# EAGLE board Rev_1 (EAGLE 9.5.2)
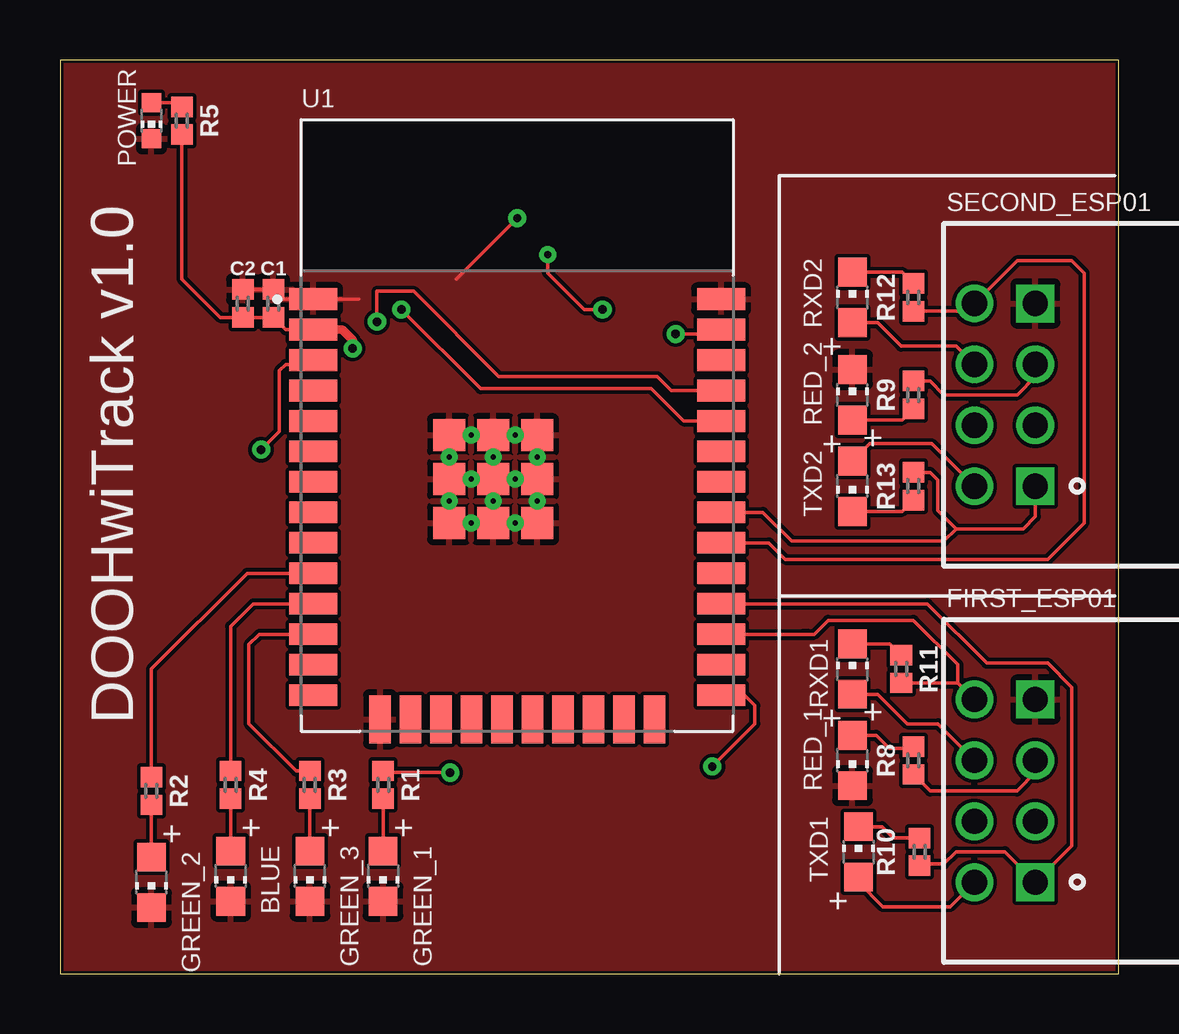
[diagram p0: board, top side]
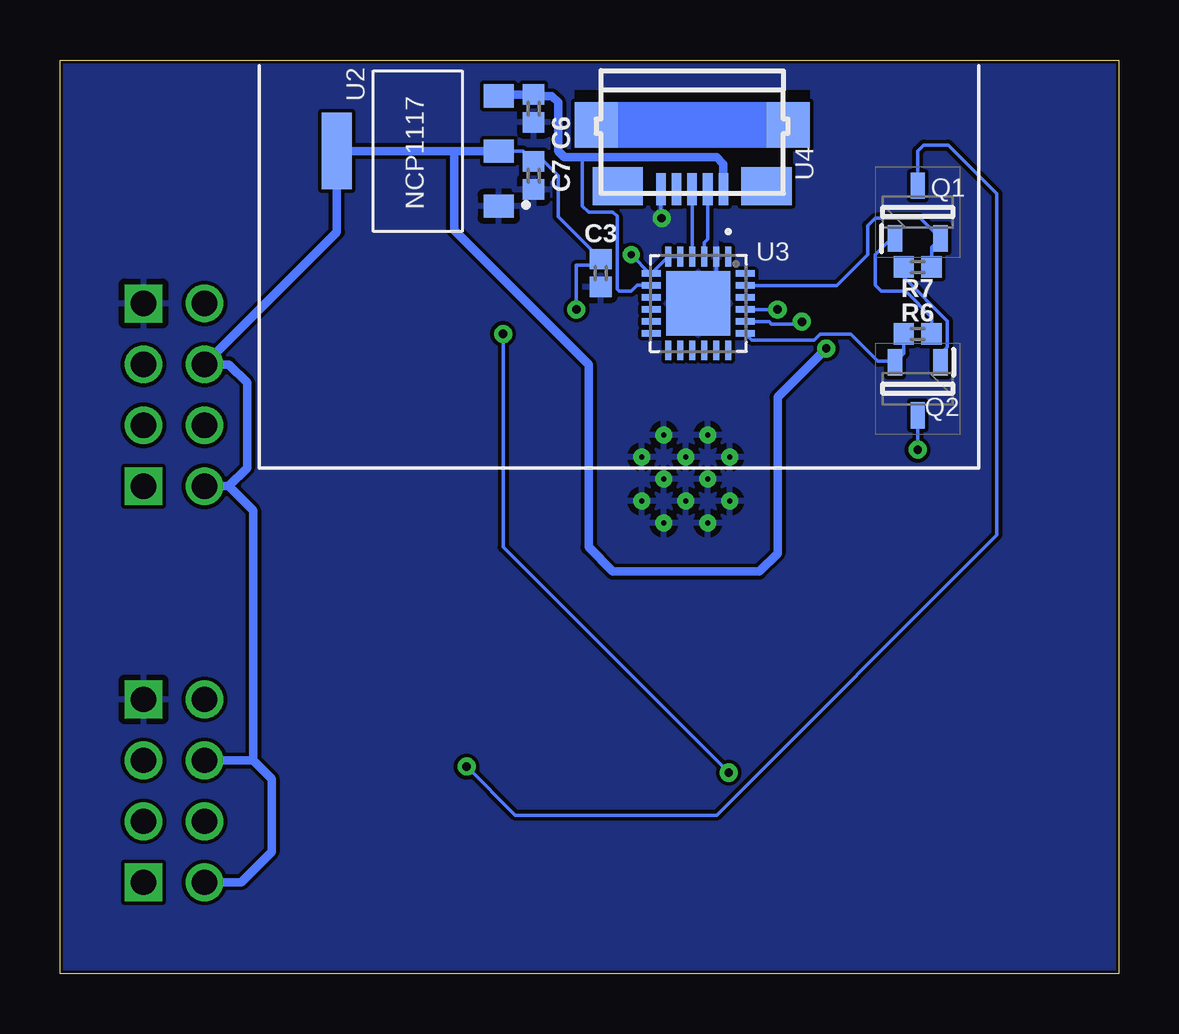
[diagram p1: board, bottom side, seen from below]

Size 44.12 x 38.09 mm. Coordinates in mm from the lower left corner, seen from the top.
Outline: 0,0 44.12,0 44.12,38.09 0,38.09 0,0
Copper layers (1*16): Top 0.035mm / dielectric 1.5mm / Bottom 0.035mm
Design rules "default *": minimum track width 6mil, minimum drill 0.35mm, track to track 6mil, track to pad 6mil, pad to pad 6mil, via to via 6mil, smd to smd 6mil, copper to edge 5mil, drill to drill 4mil, minimum pad ring 10mil, minimum via ring 8mil, stop-mask expansion 4mil, vias tented up to drill 0mil, thermal gap 10mil

## Footprints (pad centres in the part's own frame; a part is rotated, then mirrored left to right if it is on the bottom)
CHIP-LED0805 = smd 1.2 x 1.2: A 0,-1.05; C 0,1.05
0402 = smd 0.85 x 0.9: 1 -0.58,0; 2 0.58,0
XCVR_ESP8266-01/ESP-01 = drill 1.05 square: 1 0,-3.81; 4 0,3.81 | drill 1.05: 2 0,-1.27; 3 0,1.27; 5 -2.54,3.81; 6 -2.54,1.27; 7 -2.54,-1.27; 8 -2.54,-3.81
CHIP-LED0603 = smd 0.8 x 0.8: A 0,-0.75; C 0,0.75
SOT95P240X115-3N = smd 1.1 x 0.6: 1 -1.1,0.95; 2 -1.1,-0.95; 3 1.1,0
MODULE_ESP32-WROOM-32 = smd 2 x 0.9: 1 -8.5,5.26; 2 -8.5,3.99; 3 -8.5,2.72; 4 -8.5,1.45; 5 -8.5,0.18; 6 -8.5,-1.09; 7 -8.5,-2.36; 8 -8.5,-3.63; 9 -8.5,-4.9; 10 -8.5,-6.17; 11 -8.5,-7.44; 12 -8.5,-8.71; 13 -8.5,-9.98; 14 -8.5,-11.25; 25 8.5,-11.25; 26 8.5,-9.98; 27 8.5,-8.71; 28 8.5,-7.44; 29 8.5,-6.17; 30 8.5,-4.9; 31 8.5,-3.63; 32 8.5,-2.36; 33 8.5,-1.09; 34 8.5,0.18; 35 8.5,1.45; 36 8.5,2.72; 37 8.5,3.99; 38 8.5,5.26 | smd 0.9 x 2: 15 -5.715,-12.25; 16 -4.445,-12.25; 17 -3.175,-12.25; 18 -1.905,-12.25; 19 -0.635,-12.25; 20 0.635,-12.25; 21 1.905,-12.25; 22 3.175,-12.25; 23 4.445,-12.25; 24 5.715,-12.25 | smd 1.33 x 1.33: 39_1 -2.835,-0.405; 39_2 -1,-0.405; 39_3 0.835,-0.405; 39_4 -2.835,-2.24; 39_5 -1,-2.24; 39_6 0.835,-2.24; 39_7 -2.835,-4.075; 39_8 -1,-4.075; 39_9 0.835,-4.075 | drill 0.2 pad 0.3: 39_10 -1.917,-0.405; 39_11 -0.083,-0.405; 39_12 -2.835,-1.323; 39_13 -1,-1.323; 39_14 0.835,-1.323; 39_15 -1.917,-2.24; 39_16 -0.083,-2.24; 39_17 -2.835,-3.158; 39_18 -1,-3.158; 39_19 0.835,-3.158; 39_20 -1.917,-4.075; 39_21 -0.083,-4.075
SOT-223 = smd 0.96 x 1.26: 1 -2.3,-3.375; 2 0,-3.375; 3 2.3,-3.375 | smd 3.19 x 1.26: 4 0,3.375
QFN50P400X400X80-25N = smd 0.81 x 0.26: 1 -1.955,1.25; 2 -1.955,0.75; 3 -1.955,0.25; 4 -1.955,-0.25; 5 -1.955,-0.75; 6 -1.955,-1.25; 13 1.955,-1.25; 14 1.955,-0.75; 15 1.955,-0.25; 16 1.955,0.25; 17 1.955,0.75; 18 1.955,1.25 | smd 0.26 x 0.81: 7 -1.25,-1.955; 8 -0.75,-1.955; 9 -0.25,-1.955; 10 0.25,-1.955; 11 0.75,-1.955; 12 1.25,-1.955; 19 1.25,1.955; 20 0.75,1.955; 21 0.25,1.955; 22 -0.25,1.955; 23 -0.75,1.955; 24 -1.25,1.955 | smd 2.68 x 2.68: 25 0,0
J_USB_MICROAB_HIROSE_ZX62-AB-5PA = smd 0.4 x 1.35: P$1 -1.3,4.125; P$2 -0.65,4.125; P$3 0,4.125; P$4 0.65,4.125; P$5 1.3,4.125 | smd 1.8 x 1.9: SHIELD1 -4,1.45; SHIELD4 4,1.45 | smd 2.1 x 1.6: SHIELD2 -3.1,4; SHIELD3 3.1,4

## Placement (x,y rotation side)
BLUE  [CHIP-LED0805]  7.11,4.06 180 top
C1  10uF  [0402]  8.89,27.94 90 top
C2  0.1uF  [0402]  7.62,27.94 90 top
C3  10uF  [0402]  21.59,29.21 270 bottom
C6  10uF  [0402]  24.38,36.07 270 bottom
C7  10uF  [0402]  24.38,33.27 270 bottom
FIRST_ESP01  ESP8266-01/ESP-01  [XCVR_ESP8266-01/ESP-01]  40.64,7.62 0 top
GREEN_1  [CHIP-LED0805]  13.46,4.06 180 top
GREEN_2  [CHIP-LED0805]  3.81,3.81 180 top
GREEN_3  [CHIP-LED0805]  10.41,4.06 180 top
POWER  [CHIP-LED0603]  3.81,35.56 180 top
Q1  SS8050-G  [SOT95P240X115-3N]  8.38,31.75 90 bottom
Q2  SS8050-G  [SOT95P240X115-3N]  8.38,24.38 270 bottom
R1  100  [0402]  13.46,7.87 270 top
R2  100  [0402]  3.81,7.62 270 top
R3  100  [0402]  10.41,7.87 270 top
R4  100  [0402]  7.11,7.87 270 top
R5  470  [0402]  5.08,35.56 270 top
R6  10k  [0402]  8.38,26.67 0 bottom
R7  10k  [0402]  8.38,29.46 0 bottom
R8  100  [0402]  35.56,8.89 90 top
R9  100  [0402]  35.56,24.13 270 top
R10  100  [0402]  35.81,5.08 270 top
R11  100  [0402]  35.05,12.7 270 top
R12  100  [0402]  35.56,28.19 270 top
R13  100  [0402]  35.56,20.32 90 top
RED_1  [CHIP-LED0805]  33.02,8.89 180 top
RED_2  [CHIP-LED0805]  33.02,24.13 0 top
RXD1  [CHIP-LED0805]  33.02,12.7 0 top
RXD2  [CHIP-LED0805]  33.02,28.19 0 top
SECOND_ESP01  ESP8266-01/ESP-01  [XCVR_ESP8266-01/ESP-01]  40.64,24.13 0 top
TXD1  [CHIP-LED0805]  33.27,5.08 0 top
TXD2  [CHIP-LED0805]  33.02,20.32 180 top
U1  ESP32-WROOM-32  [MODULE_ESP32-WROOM-32]  19.05,22.86 0 top
U2  NCP1117ST33T3G  [SOT-223]  29.21,34.29 90 bottom
U3  CP2104-F03-GM  [QFN50P400X400X80-25N]  17.53,27.94 270 bottom
U4  J_USB_MICROAB_HIROSE_ZX62-AB-5PA  [J_USB_MICROAB_HIROSE_ZX62-AB-5PA]  17.78,36.83 180 bottom

## Library data of the parts
BLUE GREEN_1-GREEN_3 POWER RED_1 RED_2 RXD1 RXD2 TXD1 TXD2 = adafruit
C1-C3 C6 C7 = SparkFun-Capacitors; PROD_ID: CAP-12416
FIRST_ESP01 SECOND_ESP01 = ESP8266-01_ESP-01; AVAILABILITY: Unavailable; MF: AI-Thinker; MP: ESP8266-01/ESP-01; PACKAGE: None; PRICE: None
Q1 Q2 = SS8050-G_NPN_transistor; AVAILABILITY: Unavailable; DESCRIPTION: Bipolar _BJT_ Transistor NPN 25V 1.5A 100MHz 300mW Surface Mount SOT-23; MF: Comchip Technology; MP: SS8050-G; PACKAGE: TO-236 Comchip; PRICE: None
R1-R13 = SparkFun-Resistors; PROD_ID: RES-13495
U1 = ESP32-WROOM-32; AVAILABILITY: Unavailable; DESCRIPTION: Bluetooth, WiFi 802.11b/g/n, Bluetooth v4.2 + EDR, Class 1, 2 and 3 Transceiver Module 2.4GHz ~ 2.5GHz Integrated, Trace Surface Mount; MF: Espressif Systems; MP: ESP32-WROOM-32; PACKAGE: Module Espressif Systems; PRICE: None
U2 = IC; CREATED_BY: PCBLayout.com; DIGIKEY_PART_NUMBER: NCP1117ST33T3GOSTR-ND; MANUFACTURER: ON Semiconductor; MPN: NCP1117ST33T3G; PACKAGE: SOT-223
U3 = CP2104_actual; AVAILABILITY: Unavailable; DESCRIPTION: USB Bridge, USB to UART USB 2.0 UART Interface 24-QFN _4x4_; MF: Silicon Labs; MP: CP2104; PACKAGE: QFN-24 Silicon Labs; PRICE: None
U4 = eagle_MUSB_2

## Nets
1ESP01_IO2: FIRST_ESP01.3 R8.1
2ESP01_IO2: R9.1 SECOND_ESP01.3
3.3V_OUT: C1.1 C2.1 C3.1 C7.1 FIRST_ESP01.6 FIRST_ESP01.8 R5.2 RXD1.A RXD2.A SECOND_ESP01.6 SECOND_ESP01.8 TXD1.A TXD2.A U1.2 U2.2 U2.4 U3.5 U3.6 U3.7
DN: U3.4 U4.P$3
DP: U3.3 U4.P$2
DTR: Q1.2 R7.2 U3.23
EN: Q2.3 U1.3
ESP_RXD: U1.34 U3.21
ESP_TXD: U1.35 U3.20
GND: BLUE.C C1.2 C2.2 C3.2 C6.2 C7.2 FIRST_ESP01.4 GREEN_1.C GREEN_2.C GREEN_3.C POWER.C RED_1.C RED_2.C SECOND_ESP01.4 U1.1 U1.15 U1.38 U1.39_1 U1.39_2 U1.39_3 U1.39_4 U1.39_5 U1.39_6 U1.39_7 U1.39_8 U1.39_9 U1.39_10 U1.39_11 U1.39_12 U1.39_13 U1.39_14 U1.39_15 U1.39_16 U1.39_17 U1.39_18 U1.39_19 U1.39_20 U1.39_21 U2.1 U3.2 U3.25 U4.P$5
IO0: Q1.3 U1.25
LED1: R1.1 U1.37
LED2: R2.1 U1.10
LED3: R4.1 U1.11
LED4: R3.1 U1.12
LED_RXD1: FIRST_ESP01.5 R11.2 U1.27
LED_RXD2: R12.2 SECOND_ESP01.5 U1.30
LED_TXD1: FIRST_ESP01.1 R10.2 U1.28
LED_TXD2: R13.2 SECOND_ESP01.1 U1.31
N$3: GREEN_1.A R1.2
N$4: GREEN_2.A R2.2
N$5: GREEN_3.A R3.2
N$6: BLUE.A R4.2
N$8: POWER.A R5.1
N$11: R8.2 RED_1.A
N$12: Q1.1 R6.2
N$13: Q2.1 R7.1
N$14: R9.2 RED_2.A
N$15: R10.1 TXD1.C
N$17: R12.1 RXD2.C
N$18: R13.1 TXD2.C
N$21: R11.1 RXD1.C
RTS: Q2.2 R6.1 U3.19
V_USB: C6.1 U2.3 U3.8 U4.P$1

## Tracks (layer width: path | path; a pad name or v marks a point on that pad's centre or on a via)
1ESP01_IO2
  Top 0.152: FIRST_ESP01.3 40.64,8.38 39.88,7.62 36.25,7.62 R8.1
2ESP01_IO2
  Top 0.152: SECOND_ESP01.3 40.64,24.89 39.88,24.13 36.83,24.13 36.25,24.71 R9.1
3.3V_OUT  (via drill 0.3, 0.35)
  Top 0.152: RXD2.A 34.07,27.14 35.05,26.16 37.34,26.16 SECOND_ESP01.6 | TXD2.A 33.75,22.1 36.32,22.1 SECOND_ESP01.8 | RXD1.A 34.07,11.65 35.31,10.41 36.58,10.41 FIRST_ESP01.6 | FIRST_ESP01.8 37.08,2.79 34.29,2.79 33.27,3.81 TXD1.A | U1.2 9.4,26.85 C1.1 C2.1 6.68,27.36 5.08,28.96 R5.2 | v20.32,29.97 20.32,29.21 21.84,27.69 v22.61,27.69
  Top 0.356: U1.2 11.76,26.85 12.19,26.42 v12.19,26.06
  Bottom 0.152: U2.2 24.82,34.29 C7.1 23.95,33.85 23.37,33.27 23.37,31.57 C3.1 21.84,29.54 22.61,29.54 v22.61,27.69 | U3.5 U3.6 U3.7 19.54,29.19 v20.32,29.97
  Bottom 0.356: U2.2 27.69,34.29 | 27.69,34.29 U2.4 32.59,30.92 SECOND_ESP01.6 37.08,25.4 36.32,24.64 36.32,21.08 37.08,20.32 | SECOND_ESP01.8 37.08,20.32 | FIRST_ESP01.6 36.07,8.89 | 36.07,8.89 35.31,8.13 35.31,5.08 36.58,3.81 FIRST_ESP01.8 | 37.08,20.32 36.07,19.3 36.07,8.89 | 27.69,34.29 27.69,30.99 22.1,25.4 22.1,17.78 21.08,16.76 14.99,16.76 14.22,17.53 14.22,24.03 v12.19,26.06
DN
  Bottom 0.152: U3.4 17.78,31.95 U4.P$3
DP
  Bottom 0.152: U3.3 17.27,30.48 17.13,30.62 U4.P$2
DTR
  Bottom 0.152: R7.2 7.8,30.28 Q1.2 8.28,31.5 10.16,31.5 10.46,31.19 10.46,29.97 11.75,28.69 U3.23
EN  (via drill 0.35)
  Top 0.152: v8.38,21.84 9.14,22.61 9.14,25.15 9.4,25.4 10.37,25.4 U1.3
  Bottom 0.152: Q2.3 v8.38,21.84
ESP_RXD  (via drill 0.35)
  Top 0.152: U1.34 25.98,23.04 24.64,24.38 17.53,24.38 v14.22,27.69
  Bottom 0.152: U3.21 v14.22,27.69
ESP_TXD  (via drill 0.35)
  Top 0.152: v13.21,27.18 13.21,28.45 14.73,28.45 18.29,24.89 24.89,24.89 25.47,24.31 U1.35
  Bottom 0.152: v13.21,27.18 13.21,27.17 13.29,27.08 14.47,27.08 14.57,27.18 15.56,27.18 U3.20
GND  (via drill 0.35)
  Top 0.152: 12.45,28.12 U1.1 9.29,28.12 C1.2 C2.2 | 16.51,28.96 v19.05,31.5
  Bottom 0.152: U3.2 16.78,28.69 U3.25 17.53,28.45 18.03,28.96 | U4.P$5 19.08,31.78 19.05,31.75 v19.05,31.5
  pour Bottom: 0,38.1 44.2,38.1 44.2,0 0,0 0,37.85
  pour Top: 0,38.1 43.94,38.1 44.2,37.85 44.2,0 0.25,0 0,-0.25
IO0  (via drill 0.35)
  Top 0.152: v27.18,8.64 28.96,10.41 28.96,11.18 28.52,11.61 U1.25
  Bottom 0.152: Q1.3 8.38,34.29 8.13,34.54 7.11,34.54 5.08,32.51 5.08,18.29 16.76,6.6 25.15,6.6 v27.18,8.64
LED1  (via drill 0.35)
  Top 0.152: U1.37 27.37,26.67 v25.65,26.67 | v16.26,8.38 13.53,8.38 R1.1
  Bottom 0.152: v25.65,26.67 25.65,17.78 v16.26,8.38
LED2
  Top 0.152: U1.10 7.8,16.69 3.81,12.7 R2.1
LED3
  Top 0.152: U1.11 8.05,15.42 7.11,14.48 R4.1
LED4
  Top 0.152: U1.12 8.31,14.15 7.87,13.72 7.87,10.41 9.83,8.45 R3.1
LED_RXD1
  Top 0.152: U1.27 30.99,14.15 31.17,14.15 31.42,14.15 32,14.73 35.56,14.73 37.41,12.88 37.41,12.12 | R11.2 37.41,12.12 | 37.41,12.12 FIRST_ESP01.5
LED_RXD2
  Top 0.152: R12.2 37.77,27.61 SECOND_ESP01.5 39.88,29.72 42.16,29.72 42.67,29.21 42.67,18.8 41.15,17.27 30.23,17.27 29.54,17.96 U1.30
LED_TXD1
  Top 0.152: U1.28 36.14,15.42 38.61,12.95 41.15,12.95 42.16,11.94 42.16,5.33 FIRST_ESP01.1 39.37,5.08 37.34,5.08 36.83,4.57 35.89,4.57 R10.2
LED_TXD2
  Top 0.152: 37.34,18.54 36.58,19.3 36.58,20.57 36.25,20.9 R13.2 | 37.34,18.54 40.13,18.54 40.64,19.05 SECOND_ESP01.1 | U1.31 29.28,19.23 30.48,18.03 36.83,18.03 37.34,18.54
N$3
  Top 0.152: R1.2 GREEN_1.A
N$4
  Top 0.152: R2.2 GREEN_2.A
N$5
  Top 0.152: R3.2 GREEN_3.A
N$6
  Top 0.152: R4.2 BLUE.A
N$8
  Top 0.152: POWER.A 4.91,36.31 R5.1
N$11
  Top 0.152: RED_1.A 34,9.94 34.54,9.4 35.49,9.4 R8.2
N$12
  Bottom 0.152: R6.2 7.8,27.36 8.89,28.45 9.91,28.45 10.16,28.7 10.16,29.97 9.48,30.65 Q1.1
N$13
  Bottom 0.152: Q2.1 7.43,25.84 7.15,26.12 7.15,27.22 8.96,29.03 R7.1
N$14
  Top 0.152: RED_2.A 35.09,23.08 R9.2
N$15
  Top 0.152: TXD1.C 34.26,6.13 34.73,5.66 R10.1
N$17
  Top 0.152: RXD2.C 35.09,29.24 R12.1
N$18
  Top 0.152: TXD2.C 35.09,19.27 R13.1
N$21
  Top 0.152: RXD1.C 34.58,13.75 R11.1
RTS
  Bottom 0.152: 15.55,26.67 U3.19 15.3,26.42 12.7,26.42 12.45,26.67 11.18,26.67 10.04,25.54 9.28,25.54 | Q2.2 9.28,25.54 | 9.28,25.54 8.96,25.85 R6.1
V_USB
  Bottom 0.152: 25.78,36.65 U2.3 | 22.35,34.04 22.35,32 22.1,31.75 21.08,31.75 20.91,31.58 20.91,28.53 20.83,28.45 20.32,28.45 20.07,28.7 19.49,28.7 U3.8
  Bottom 0.356: 25.78,36.65 C6.1 24.31,36.58 23.62,36.58 23.37,36.32 23.37,34.29 23.12,34.04 22.35,34.04 16.76,34.04 16.48,33.75 U4.P$1

## Text on the board
tNames: DOOHwiTrack v1.0
bNames: NCP1117